# EAGLE board ATW-Farmcard (EAGLE 5.12)
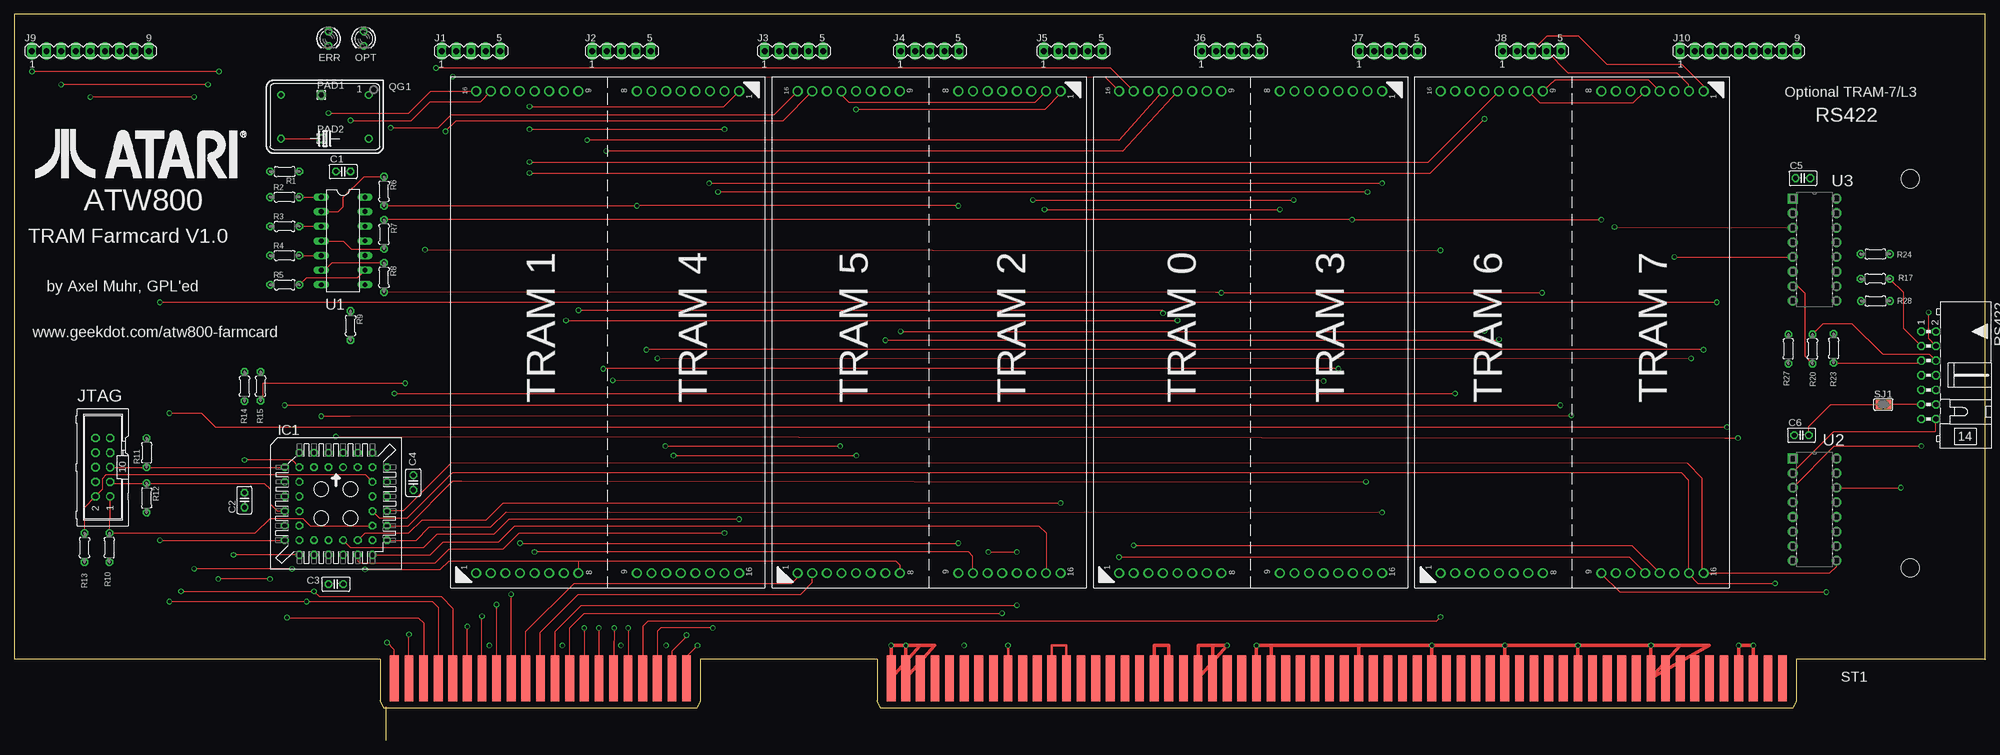
[diagram p0: board, top side]
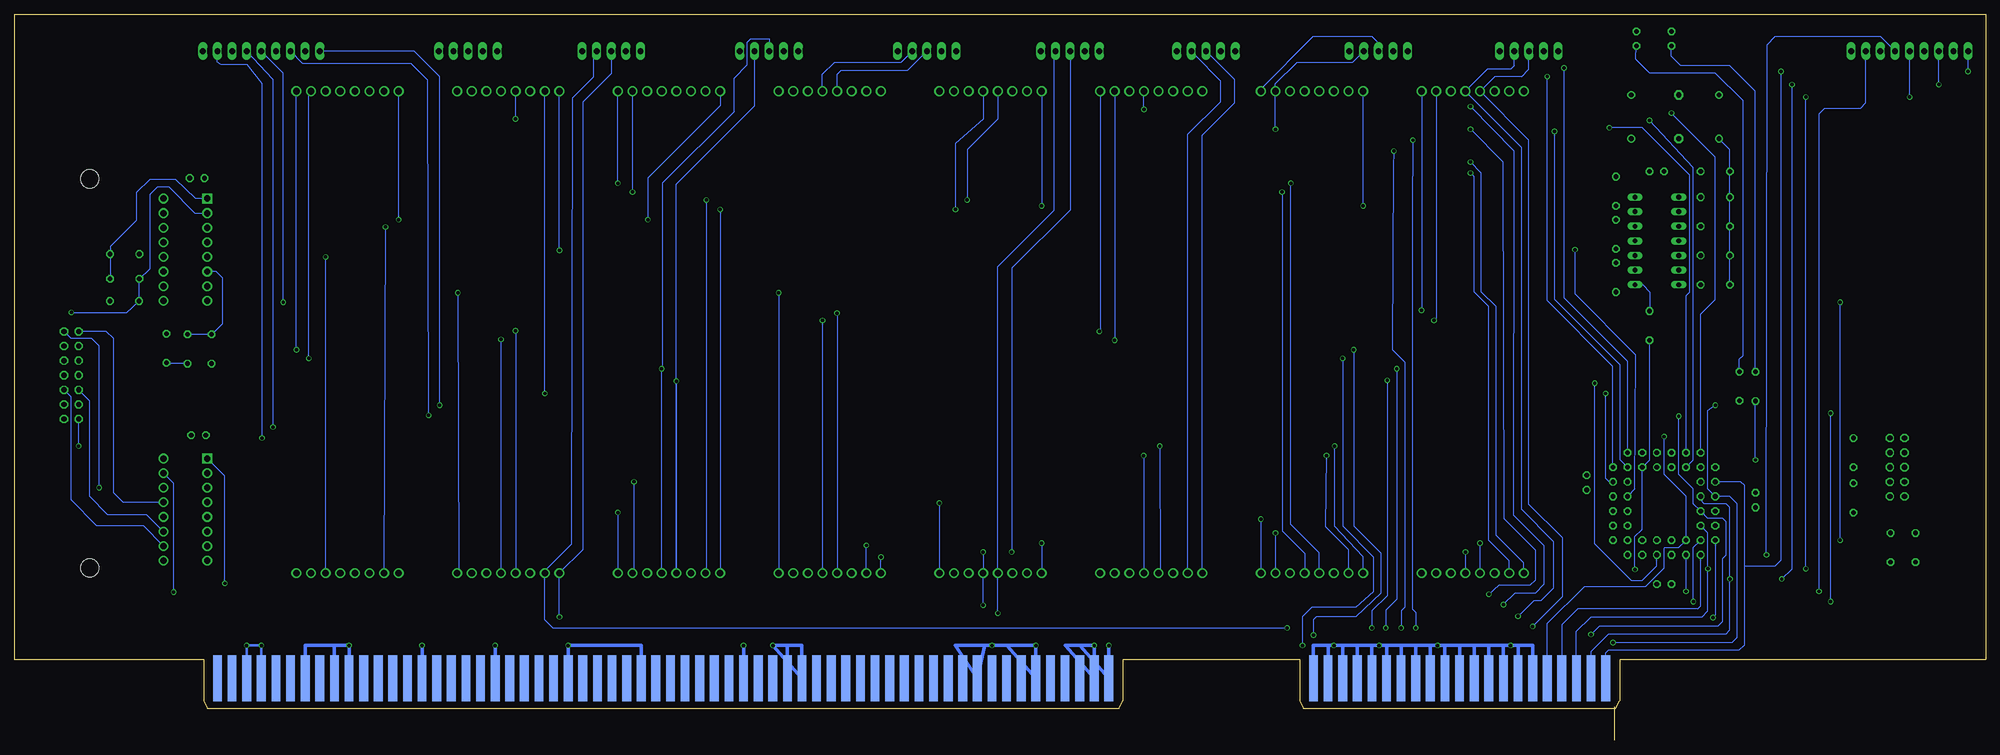
[diagram p1: board, bottom side, seen from below]

Size 342.65 x 126.27 mm. Coordinates in mm from the lower left corner, seen from the top.
Outline: 342.54,13.97 342.54,126.27 0,126.27 0,14.1 61.6,14.1
Copper layers (1+2*15+16): Top 0.035mm / dielectric 1.5mm / $GND 0.035mm / dielectric 0.15mm / $VCC 0.035mm / dielectric 0.2mm / Bottom 0.035mm
Design rules "ShenZhen2U EagleRules *": minimum track width 6mil, minimum drill 12mil, track to track 6mil, track to pad 6mil, pad to pad 7mil, via to via 7mil, smd to smd 0mil, copper to edge 20mil, drill to drill 10mil, minimum pad ring 10mil, minimum via ring 6mil, stop-mask expansion 2mil, vias tented up to drill 25mil, thermal gap 10mil
Holes 3.2 mm at 329.56,97.66 329.56,29.97

## Footprints (pad centres in the part's own frame; a part is rotated, then mirrored left to right if it is on the bottom)
C025-025X050 = drill 0.813 octagon: 1 -1.27,0; 2 1.27,0
LED3MM = drill 0.813 octagon: A -1.27,0; K 1.27,0
PLCC-S44 = drill 0.813 round: 1 1.27,6.35 | drill 0.813 octagon: 2 -1.27,8.89; 3 -1.27,6.35; 4 -3.81,8.89; 5 -3.81,6.35; 6 -6.35,8.89; 7 -8.89,6.35; 8 -6.35,6.35; 9 -8.89,3.81; 10 -6.35,3.81; 11 -8.89,1.27; 12 -6.35,1.27; 13 -8.89,-1.27; 14 -6.35,-1.27; 15 -8.89,-3.81; 16 -6.35,-3.81; 17 -8.89,-6.35; 18 -6.35,-8.89; 19 -6.35,-6.35; 20 -3.81,-8.89; 21 -3.81,-6.35; 22 -1.27,-8.89; 23 -1.27,-6.35; 24 1.27,-8.89; 25 1.27,-6.35; 26 3.81,-8.89; 27 3.81,-6.35; 28 6.35,-8.89; 29 8.89,-6.35; 30 6.35,-6.35; 31 8.89,-3.81; 32 6.35,-3.81; 33 8.89,-1.27; 34 6.35,-1.27; 35 8.89,1.27; 36 6.35,1.27; 37 8.89,3.81; 38 6.35,3.81; 39 8.89,6.35; 40 6.35,8.89; 41 6.35,6.35; 42 3.81,8.89; 43 3.81,6.35; 44 1.27,8.89
MA05-1 = drill 1.016 long: 1 -5.08,0; 2 -2.54,0; 3 0,0; 4 2.54,0; 5 5.08,0
MA09-1 = drill 1.016 long: 1 -10.16,0; 2 -7.62,0; 3 -5.08,0; 4 -2.54,0; 5 0,0; 6 2.54,0; 7 5.08,0; 8 7.62,0; 9 10.16,0
ML10 = drill 0.914 octagon: 1 -5.08,-1.27; 2 -5.08,1.27; 3 -2.54,-1.27; 4 -2.54,1.27; 5 0,-1.27; 6 0,1.27; 7 2.54,-1.27; 8 2.54,1.27; 9 5.08,-1.27; 10 5.08,1.27
1,6/0,9 = drill 0.914 pad 1.6 octagon: 1 0,0
DIL14S = drill 0.813 round: 1 -7.62,-3.81; 7 7.62,-3.81; 8 7.62,3.81; 14 -7.62,3.81
0204/5 = drill 0.813 octagon: 1 -2.54,0; 2 2.54,0
ML14L = drill 0.914 octagon: 1 -7.62,-1.27; 2 -7.62,1.27; 3 -5.08,-1.27; 4 -5.08,1.27; 5 -2.54,-1.27; 6 -2.54,1.27; 7 0,-1.27; 8 0,1.27; 9 2.54,-1.27; 10 2.54,1.27; 11 5.08,-1.27; 12 5.08,1.27; 13 7.62,-1.27; 14 7.62,1.27
SJ = smd 1.168 x 1.6: 1 -0.762,0; 2 0.762,0
ATW_FARMCARD = smd 1.524 x 8.001: A1 -30.48,4.445; A2 -33.02,4.445; A3 -35.56,4.445; A4 -38.1,4.445; A5 -40.64,4.445; A6 -43.18,4.445; A7 -45.72,4.445; A8 -48.26,4.445; A9 -50.8,4.445; A10 -53.34,4.445; A11 -55.88,4.445; A12 -58.42,4.445; A13 -60.96,4.445; A14 -63.5,4.445; A15 -66.04,4.445; A16 -68.58,4.445; A17 -71.12,4.445; A18 -73.66,4.445; A19 -76.2,4.445; A20 -78.74,4.445; A21 -81.28,4.445; A22 -83.82,4.445; A23 -86.36,4.445; A24 -88.9,4.445; A25 -91.44,4.445; A26 -93.98,4.445; A27 -96.52,4.445; A28 -99.06,4.445; A29 -101.6,4.445; A30 -104.14,4.445; A31 -106.68,4.445; A32 -109.22,4.445; A33 -111.76,4.445; A34 -114.3,4.445; A35 -116.84,4.445; A36 -119.38,4.445; A37 -121.92,4.445; A38 -124.46,4.445; A39 -127,4.445; A40 -129.54,4.445; A41 -132.08,4.445; A42 -134.62,4.445; A43 -137.16,4.445; A44 -139.7,4.445; A45 -142.24,4.445; A46 -144.78,4.445; A47 -147.32,4.445; A48 -149.86,4.445; A49 -152.4,4.445; A50 -154.94,4.445; A51 -157.48,4.445; A52 -160.02,4.445; A53 -162.56,4.445; A54 -165.1,4.445; A55 -167.64,4.445; A56 -170.18,4.445; A57 -172.72,4.445; A58 -175.26,4.445; A59 -177.8,4.445; A60 -180.34,4.445; A61 -182.88,4.445; A62 -185.42,4.445; C01 -220.98,4.445; C02 -223.52,4.445; C03 -226.06,4.445; C04 -228.6,4.445; C05 -231.14,4.445; C06 -233.68,4.445; C07 -236.22,4.445; C08 -238.76,4.445; C09 -241.3,4.445; C10 -243.84,4.445; C11 -246.38,4.445; C12 -248.92,4.445; C13 -251.46,4.445; C14 -254,4.445; C15 -256.54,4.445; C16 -259.08,4.445; C17 -261.62,4.445; C18 -264.16,4.445; C19 -266.7,4.445; C20 -269.24,4.445; C21 -271.78,4.445 | smd 1.524 x 8.001 bottom: B1 -30.48,4.445; B2 -33.02,4.445; B3 -35.56,4.445; B4 -38.1,4.445; B5 -40.64,4.445; B6 -43.18,4.445; B7 -45.72,4.445; B8 -48.26,4.445; B9 -50.8,4.445; B10 -53.34,4.445; B11 -55.88,4.445; B12 -58.42,4.445; B13 -60.96,4.445; B14 -63.5,4.445; B15 -66.04,4.445; B16 -68.58,4.445; B17 -71.12,4.445; B18 -73.66,4.445; B19 -76.2,4.445; B20 -78.74,4.445; B21 -81.28,4.445; B22 -83.82,4.445; B23 -86.36,4.445; B24 -88.9,4.445; B25 -91.44,4.445; B26 -93.98,4.445; B27 -96.52,4.445; B28 -99.06,4.445; B29 -101.6,4.445; B30 -104.14,4.445; B31 -106.68,4.445; B32 -109.22,4.445; B33 -111.76,4.445; B34 -114.3,4.445; B35 -116.84,4.445; B36 -119.38,4.445; B37 -121.92,4.445; B38 -124.46,4.445; B39 -127,4.445; B40 -129.54,4.445; B41 -132.08,4.445; B42 -134.62,4.445; B43 -137.16,4.445; B44 -139.7,4.445; B45 -142.24,4.445; B46 -144.78,4.445; B47 -147.32,4.445; B48 -149.86,4.445; B49 -152.4,4.445; B50 -154.94,4.445; B51 -157.48,4.445; B52 -160.02,4.445; B53 -162.56,4.445; B54 -165.1,4.445; B55 -167.64,4.445; B56 -170.18,4.445; B57 -172.72,4.445; B58 -175.26,4.445; B59 -177.8,4.445; B60 -180.34,4.445; B61 -182.88,4.445; B62 -185.42,4.445; D01 -220.98,4.445; D02 -223.52,4.445; D03 -226.06,4.445; D04 -228.6,4.445; D05 -231.14,4.445; D06 -233.68,4.445; D07 -236.22,4.445; D08 -238.76,4.445; D09 -241.3,4.445; D10 -243.84,4.445; D11 -246.38,4.445; D12 -248.92,4.445; D13 -251.46,4.445; D14 -254,4.445; D15 -256.54,4.445; D16 -259.08,4.445; D17 -261.62,4.445; D18 -264.16,4.445; D19 -266.7,4.445; D20 -269.24,4.445; D21 -271.78,4.445
TRAM_SIZE2_SOCKET = drill 1.143 pad 1.676 round: A1 0.635,-1.524; A2 0.635,-4.064; A3 0.635,-6.604; A4 0.635,-9.144; A5 0.635,-11.684; A6 0.635,-14.224; A7 0.635,-16.764; A8 0.635,-19.304; A9 84.455,-19.304; A10 84.455,-16.764; A11 84.455,-14.224; A12 84.455,-11.684; A13 84.455,-9.144; A14 84.455,-6.604; A15 84.455,-4.064; A16 84.455,-1.524; B1 84.455,-47.244; B2 84.455,-44.704; B3 84.455,-42.164; B4 84.455,-39.624; B5 84.455,-37.084; B6 84.455,-34.544; B7 84.455,-32.004; B8 84.455,-29.464; B9 0.635,-29.464; B10 0.635,-32.004; B11 0.635,-34.544; B12 0.635,-37.084; B13 0.635,-39.624; B14 0.635,-42.164; B15 0.635,-44.704; B16 0.635,-47.244
DIL14 = drill 0.813 long: 1 -7.62,-3.81; 2 -5.08,-3.81; 3 -2.54,-3.81; 4 0,-3.81; 5 2.54,-3.81; 6 5.08,-3.81; 7 7.62,-3.81; 8 7.62,3.81; 9 5.08,3.81; 10 2.54,3.81; 11 0,3.81; 12 -2.54,3.81; 13 -5.08,3.81; 14 -7.62,3.81
DIP254P762X508-16 = drill 1.118 square: 1 -7.62,17.78 | drill 1.118 round: 2 -7.62,15.24; 3 -7.62,12.7; 4 -7.62,10.16; 5 -7.62,7.62; 6 -7.62,5.08; 7 -7.62,2.54; 8 -7.62,0; 9 0,0; 10 0,2.54; 11 0,5.08; 12 0,7.62; 13 0,10.16; 14 0,12.7; 15 0,15.24; 16 0,17.78

## Placement (x,y rotation side)
C1  100nf  [C025-025X050]  57.15,98.93 0 top
C2  100nf  [C025-025X050]  40.01,41.78 90 top
C3  100nf  [C025-025X050]  55.88,27.18 0 top
C4  100nf  [C025-025X050]  69.34,44.83 90 top
C5  100nF  [C025-025X050]  310.9,97.79 0 top
C6  100nF  [C025-025X050]  310.64,53.09 0 top
ERR  [LED3MM]  54.61,122.05 270 top
IC1  EPM7064S44  [PLCC-S44]  55.88,41.15 0 top
J1  [MA05-1]  79.38,119.89 0 top
J2  [MA05-1]  105.54,119.89 0 top
J3  [MA05-1]  135.51,119.89 0 top
J4  [MA05-1]  159.13,119.89 0 top
J5  [MA05-1]  184.02,119.89 0 top
J6  [MA05-1]  211.46,119.89 0 top
J7  [MA05-1]  238.89,119.89 0 top
J8  [MA05-1]  263.78,119.89 0 top
J9  [MA09-1]  13.21,119.89 0 top
J10  [MA09-1]  299.72,119.89 0 top
JTAG  [ML10]  15.37,47.5 90 top
OPT  [LED3MM]  60.71,122.05 270 top
PAD1  [1,6/0,9]  53.34,112.27 0 top
PAD2  [1,6/0,9]  53.34,104.65 0 top
QG1  5MHz  [DIL14S]  53.98,108.46 180 top
R1  4k7  [0204/5]  46.99,98.93 180 top
R2  100  [0204/5]  46.99,94.49 0 top
R3  100  [0204/5]  46.99,89.41 0 top
R4  100  [0204/5]  46.99,84.33 0 top
R5  100  [0204/5]  46.99,79.25 0 top
R6  100  [0204/5]  64.26,95.5 270 top
R7  100  [0204/5]  64.26,88.01 90 top
R8  100  [0204/5]  64.26,80.52 270 top
R9  100  [0204/5]  58.42,72.14 270 top
R10  10K  [0204/5]  16.51,33.53 90 top
R11  10K  [0204/5]  22.99,50.04 90 top
R12  10K  [0204/5]  22.99,42.16 270 top
R13  10K  [0204/5]  12.19,33.53 270 top
R14  330  [0204/5]  40.01,61.55 90 top
R15  330  [0204/5]  42.8,61.59 90 top
R17  120  [0204/5]  323.47,80.26 0 top
R20  120  [0204/5]  312.55,68.07 90 top
R23  1k  [0204/5]  316.23,68.2 90 top
R24  1k  [0204/5]  323.47,84.58 180 top
R27  1k  [0204/5]  308.36,68.07 90 top
R28  1k  [0204/5]  323.51,76.41 180 top
RS422  [ML14L]  332.74,63.5 270 top
SJ1  [SJ]  324.87,58.42 0 top
ST1  [ATW_FARMCARD]  337.82,6.35 0 top
TRAM2DEV_1  slot_6_7  [TRAM_SIZE2_SOCKET]  246.38,28.45 90 top
TRAM2DEV_2  slot_0_3  [TRAM_SIZE2_SOCKET]  190.5,28.45 90 top
TRAM2DEV_3  slot_5_2  [TRAM_SIZE2_SOCKET]  134.62,28.45 90 top
TRAM2DEV_4  SLOT_1_4  [TRAM_SIZE2_SOCKET]  78.74,28.45 90 top
U1  7414N  [DIL14]  57.15,86.87 270 top
U2  LS31  [DIP254P762X508-16]  316.74,31.24 0 top
U3  LS32  [DIP254P762X508-16]  316.74,76.45 0 top

## Library data of the parts
C1-C6 R1-R15 R17 R20 R23 R24 R27 R28 = rcl
ERR OPT = led
IC1 = altera; MPN: EPM7064SLC44-10N; OC_FARNELL: 1549449; OC_NEWARK: 51R0526
J1-J10 = con-lstb; OC_FARNELL: unknown; OC_NEWARK: unknown
JTAG RS422 = con-ml; OC_FARNELL: unknown; OC_NEWARK: unknown
PAD1 PAD2 = wirepad
QG1 = crystal; OC_FARNELL: unknown; OC_NEWARK: unknown
SJ1 = jumper
ST1 TRAM2DEV_1-TRAM2DEV_4 = axels
U1 = 74ttl-din
U2 = axels; MPN: DS26LS31CN; OC_FARNELL: 9487867; OC_NEWARK: 41K1835; PACKAGE: 16-DIP; SUPPLIER: National Semiconductor
U3 = axels; MPN: AM26C32IN; OC_FARNELL: 1295964; OC_NEWARK: 74C7309; PACKAGE: PDIP-16; SUPPLIER: Texas Instruments

## Nets
0_0IN: J5.4 ST1.C07 TRAM2DEV_2.A12
0_0OUT: J5.3 ST1.C08 TRAM2DEV_2.A13
0_1IN_3_OUT: TRAM2DEV_2.A5 TRAM2DEV_4.A10
0_1OUT_1_3IN: TRAM2DEV_2.A4 TRAM2DEV_4.A9
0_3IN: TRAM2DEV_2.A9
0_3OUT: TRAM2DEV_2.A10
0_ANA: IC1.39 TRAM2DEV_2.A16
0_ERR: TRAM2DEV_2.A14
0_RES: IC1.40 TRAM2DEV_2.A15
1_0IN: J1.4 ST1.C15 TRAM2DEV_4.A12
1_0OUT: J1.3 ST1.C16 TRAM2DEV_4.A13
1_1IN_2_3OUT: TRAM2DEV_3.B10 TRAM2DEV_4.A5
1_1OUT_2_3IN: TRAM2DEV_3.B9 TRAM2DEV_4.A4
1_2IN_6_0OUT: TRAM2DEV_1.A13 TRAM2DEV_4.A2
1_2OUT_6_0IN: TRAM2DEV_1.A12 TRAM2DEV_4.A1
1_ANA: IC1.6 TRAM2DEV_4.A16
1_ERR: TRAM2DEV_4.A14
1_RES: IC1.5 TRAM2DEV_4.A15
2_0IN: J4.4 ST1.C09 TRAM2DEV_3.B12
2_0OUT: J4.3 ST1.C10 TRAM2DEV_3.B13
2_1IN_3_3OUT: TRAM2DEV_2.B10 TRAM2DEV_3.B5
2_1OUT_3_3IN: TRAM2DEV_2.B9 TRAM2DEV_3.B4
2_ANA: IC1.27 TRAM2DEV_3.B16
2_ERR: TRAM2DEV_3.B14
2_RES: IC1.28 TRAM2DEV_3.B15
3_0IN: J6.4 ST1.C05 TRAM2DEV_2.B12
3_0OUT: J6.3 ST1.C06 TRAM2DEV_2.B13
3_1IN: TRAM2DEV_2.B5
3_1OUT: TRAM2DEV_2.B4
3_2IN_4_0OUT: TRAM2DEV_2.B2 TRAM2DEV_4.B13
3_2OUT_4_0IN: TRAM2DEV_2.B1 TRAM2DEV_4.B12
3_ANA: IC1.29 TRAM2DEV_2.B16
3_ERR: TRAM2DEV_2.B14
3_RES: IC1.31 TRAM2DEV_2.B15
4_1IN: TRAM2DEV_4.B4
4_1OUT: TRAM2DEV_4.B5
4_2IN: J2.4 ST1.C13 TRAM2DEV_4.B2
4_2OUT: J2.3 ST1.C14 TRAM2DEV_4.B1
4_3IN_5_1OUT: TRAM2DEV_3.A4 TRAM2DEV_4.B9
4_3OUT_5_1IN: TRAM2DEV_3.A5 TRAM2DEV_4.B10
4_ANA: IC1.25 TRAM2DEV_4.B16
4_ERR: TRAM2DEV_4.B14
4_RES: IC1.26 TRAM2DEV_4.B15
5_0IN_2_2OUT: TRAM2DEV_3.A12 TRAM2DEV_3.B1
5_0OUT_2_2IN: TRAM2DEV_3.A13 TRAM2DEV_3.B2
5_2IN: J3.4 ST1.C11 TRAM2DEV_3.A2
5_2OUT: J3.3 ST1.C12 TRAM2DEV_3.A1
5_3IN_6_1OUT: TRAM2DEV_1.A4 TRAM2DEV_3.A9
5_3OUT_6_1IN: TRAM2DEV_1.A5 TRAM2DEV_3.A10
5_ANA: IC1.4 TRAM2DEV_3.A16
5_ERR: TRAM2DEV_3.A14
5_RES: IC1.41 TRAM2DEV_3.A15
6_2IN: J7.4 ST1.C03 TRAM2DEV_1.A2
6_2OUT: J7.3 ST1.C04 TRAM2DEV_1.A1
6_3IN_7_1OUT: TRAM2DEV_1.A9 TRAM2DEV_1.B4
6_3OUT_7_1IN: TRAM2DEV_1.A10 TRAM2DEV_1.B5
6_ANA: IC1.36 TRAM2DEV_1.A16
6_ERR: TRAM2DEV_1.A14
6_RES: IC1.37 TRAM2DEV_1.A15
7_0IN_0_2OUT: TRAM2DEV_1.B12 TRAM2DEV_2.A1
7_0OUT_0_2IN: TRAM2DEV_1.B13 TRAM2DEV_2.A2
7_2IN: J8.4 ST1.C01 TRAM2DEV_1.B2
7_2OUT: J8.3 ST1.C02 TRAM2DEV_1.B1
7_3IN: TRAM2DEV_1.B9 U2.15
7_3OUT: TRAM2DEV_1.B10 U3.3
7_ANA: IC1.33 TRAM2DEV_1.B16 U2.9
7_ERR: TRAM2DEV_1.B14 U3.5
7_RES: IC1.34 TRAM2DEV_1.B15 U2.1
+UB: U1.14
-UB: U1.7
ANA1_MINUS: RS422.9 U2.11
ANA1_PLUS: RS422.10 U2.10
CLK_1: R6.2 TRAM2DEV_3.B8 TRAM2DEV_4.B8
CLK_2: R7.2 TRAM2DEV_1.B8 TRAM2DEV_2.B8
CLK_3: R8.2 TRAM2DEV_1.A8 TRAM2DEV_2.A8
CLK_4: IC1.43 R9.2 TRAM2DEV_3.A8 TRAM2DEV_4.A8
ERROR1_MINUS: R20.1 R23.1 RS422.5 U3.7
ERROR1_PLUS: R20.2 R27.2 RS422.6 U3.6
FAST_IN: IC1.12 J9.3 ST1.D20
FAST_OUT: IC1.14 J10.3 ST1.C20
GLOBAL_RESET_IN: IC1.18 J9.6 ST1.D18
GLOBAL_RESET_OUT: IC1.19 J10.6 ST1.C18
GND: C1.2 C2.2 C3.2 C4.2 C5.2 C6.2 IC1.2 IC1.10 IC1.22 IC1.30 IC1.42 IC1.44 J1.1 J1.5 J2.1 J2.5 J3.1 J3.5 J4.1 J4.5 J5.1 J5.5 J6.1 J6.5 J7.1 J7.5 J8.1 J8.5 J9.9 J10.9 JTAG.6 JTAG.10 PAD1.1 QG1.7 R10.1 R27.1 R28.1 RS422.7 RS422.8 SJ1.1 ST1.A6 ST1.A8 ST1.A10 ST1.A15 ST1.A20 ST1.A25 ST1.A30 ST1.A36 ST1.A37 ST1.A54 ST1.B7 ST1.B9 ST1.B10 ST1.B15 ST1.B20 ST1.B25 ST1.B30 ST1.B37 ST1.B51 ST1.B53 ST1.B55 ST1.B57 ST1.D01 ST1.D02 ST1.D03 ST1.D04 ST1.D05 ST1.D06 ST1.D07 ST1.D08 ST1.D09 ST1.D10 ST1.D11 ST1.D12 ST1.D13 ST1.D14 ST1.D15 ST1.D16 TRAM2DEV_1.A11 TRAM2DEV_1.B11 TRAM2DEV_2.A11 TRAM2DEV_2.B11 TRAM2DEV_3.A11 TRAM2DEV_3.B11 TRAM2DEV_4.A11 TRAM2DEV_4.B11 U2.7 U2.8 U2.12 U3.8 U3.12
L_IN: IC1.9 J9.1 ST1.D21
L_OUT: IC1.11 J10.1 ST1.C21
LINKIN1_MINUS: R17.2 R24.1 RS422.3 U3.1
LINKIN1_PLUS: R17.1 R28.2 RS422.4 U3.2
LINKOUT1_MINUS: RS422.1 U2.13
LINKOUT1_PLUS: RS422.2 U2.14
N$1: PAD2.1 QG1.8 R1.2 R2.1 R3.1 R4.1 R5.1
N$2: R2.2 U1.1
N$3: R3.2 U1.3
N$4: R4.2 U1.5
N$5: R5.2 U1.9
N$6: R9.1 U1.8
N$7: R8.1 U1.6
N$8: R7.1 U1.4
N$9: R6.1 U1.2
N$10: ERR.K R14.2
N$11: IC1.8 R14.1
N$12: ST1.A50 ST1.A51
N$13: IC1.24 R15.1
N$14: J10.2
N$15: ST1.A43 ST1.A44
N$16: OPT.K R15.2
N$18: RS422.11 RS422.12 SJ1.2
N$20: IC1.32 JTAG.1 R10.2
N$24: IC1.38 JTAG.2 R13.1
N$25: IC1.13 JTAG.3 R12.1
N$26: IC1.7 JTAG.5 R11.1
N$28: J9.2
RESET1_MINUS: RS422.13 U2.3
RESET1_PLUS: RS422.14 U2.2
SLOW_IN: IC1.16 J9.5 ST1.D19
SLOW_OUT: IC1.17 J10.5 ST1.C19
T_ERR_I: IC1.20 J9.8 ST1.C17
T_ERR_O: IC1.21 J10.8 ST1.D17
VCC: C1.1 C2.1 C3.1 C4.1 C5.1 C6.1 ERR.A IC1.1 IC1.15 IC1.23 IC1.35 JTAG.7 OPT.A QG1.14 R1.1 R11.2 R12.2 R13.2 R23.2 R24.2 ST1.A3 ST1.A4 ST1.A39 ST1.A40 ST1.A41 ST1.A59 ST1.A60 ST1.A61 ST1.A62 ST1.B3 ST1.B4 ST1.B39 ST1.B40 ST1.B41 ST1.B59 ST1.B60 ST1.B61 ST1.B62 TRAM2DEV_1.A3 TRAM2DEV_1.A6 TRAM2DEV_1.A7 TRAM2DEV_1.B3 TRAM2DEV_1.B6 TRAM2DEV_1.B7 TRAM2DEV_2.A3 TRAM2DEV_2.A6 TRAM2DEV_2.A7 TRAM2DEV_2.B3 TRAM2DEV_2.B6 TRAM2DEV_2.B7 TRAM2DEV_3.A3 TRAM2DEV_3.A6 TRAM2DEV_3.A7 TRAM2DEV_3.B3 TRAM2DEV_3.B6 TRAM2DEV_3.B7 TRAM2DEV_4.A3 TRAM2DEV_4.A6 TRAM2DEV_4.A7 TRAM2DEV_4.B3 TRAM2DEV_4.B6 TRAM2DEV_4.B7 U2.4 U2.16 U3.4 U3.16

## Tracks (layer width: path | path; a pad name or v marks a point on that pad's centre or on a via)
0_0IN  (via drill 0.6)
  Top 0.152: v101.6,19.56 ST1.C07 | v102.87,102.49 192.66,102.49 TRAM2DEV_2.A12
  Bottom 0.152: TRAM2DEV_2.A12 202.18,115.82 200.03,117.98 188.47,117.98 J5.4 | v101.6,19.56 101.6,22.48 100.96,23.11 100.96,65.79 103.12,67.94 103,99.69 v102.87,102.49
0_0OUT  (via drill 0.6)
  Top 0.152: v99.06,19.56 ST1.C08 | v99.57,104.39 192.02,104.39 TRAM2DEV_2.A13
  Bottom 0.152: TRAM2DEV_2.A13 199.64,115.82 198.88,116.59 187.33,116.59 J5.3 | v99.06,19.56 99.06,22.23 99.69,22.86 99.69,91.82 v99.57,104.39
0_1IN_3_OUT  (via drill 0.6)
  Top 0.152: v95.88,73.03 v202.18,73.03
  Bottom 0.152: TRAM2DEV_4.A10 95.5,73.41 v95.88,73.03 | v202.18,73.03 TRAM2DEV_2.A5
0_1OUT_1_3IN  (via drill 0.6)
  Top 0.152: v98.04,74.8 199.52,74.8 v199.64,74.3
  Bottom 0.152: TRAM2DEV_4.A9 v98.04,74.8 | v199.64,74.3 TRAM2DEV_2.A4
0_ANA  (via drill 0.6)
  Top 0.152: v76.2,115.44 83.57,115.44 189.61,115.32 TRAM2DEV_2.A16
  Bottom 0.152: IC1.39 64.77,65.02 76.2,76.45 v76.2,115.44
0_RES  (via drill 0.6)
  Top 0.152: v73.28,116.97 190.5,116.97 TRAM2DEV_2.A15
  Bottom 0.152: IC1.40 62.23,65.91 73.28,76.96 v73.28,116.97
1_0IN  (via drill 0.6)
  Top 0.152: ST1.C15 v81.28,21.59
  Bottom 0.152: J1.4 81.91,117.35 82.55,116.71 86.61,116.71 TRAM2DEV_4.A12 80.64,103.12 80.64,40.13 75.06,34.54 75.06,26.54 77.22,24.38 78.49,24.38 v81.28,21.59
1_0OUT  (via drill 0.6)
  Top 0.152: ST1.C16 v78.74,19.81
  Bottom 0.152: J1.3 79.38,116.71 80.64,115.44 85.34,115.44 TRAM2DEV_4.A13 79.38,104.39 79.38,41.02 73.53,35.18 73.53,25.02 v78.74,19.81
1_1IN_2_3OUT  (via drill 0.6)
  Top 0.152: TRAM2DEV_3.B10 166.62,32 165.86,32.77 v90.42,32.77
  Bottom 0.152: v90.42,32.77 TRAM2DEV_4.A5
1_1OUT_2_3IN  (via drill 0.6)
  Top 0.152: v87.88,34.29 v164.08,34.29
  Bottom 0.152: TRAM2DEV_4.A4 v87.88,34.29 | v164.08,34.29 TRAM2DEV_3.B9
1_2IN_6_0OUT  (via drill 0.6)
  Top 0.152: v89.53,98.68 246.13,98.68 v255.52,108.08
  Bottom 0.152: TRAM2DEV_4.A2 82.8,31.24 86.36,34.8 86.36,75.44 88.9,77.98 88.9,98.04 v89.53,98.68 | v255.52,108.08 TRAM2DEV_1.A13
1_2OUT_6_0IN  (via drill 0.6)
  Top 0.152: v89.53,100.58 245.75,100.58 TRAM2DEV_1.A12
  Bottom 0.152: TRAM2DEV_4.A1 80.26,30.86 85.09,35.69 85.09,75.44 87.63,77.98 87.63,98.68 v89.53,100.58
1_ANA  (via drill 0.6)
  Top 0.152: v54.61,109.09 68.58,109.09 72.39,112.9 TRAM2DEV_4.A16
  Bottom 0.152: IC1.6 49.53,74.17 46.99,76.71 46.99,101.47 v54.61,109.09
1_RES  (via drill 0.6)
  Top 0.152: v58.42,107.82 68.96,107.82 72.26,111.12 81.03,111.12 TRAM2DEV_4.A15
  Bottom 0.152: IC1.5 50.8,48.77 50.8,99.57 v58.42,107.82
2_0IN  (via drill 0.6)
  Top 0.152: ST1.C09 96.52,19.56 99.06,22.1 v171.7,22.1
  Bottom 0.152: v171.7,22.1 TRAM2DEV_3.B12 171.7,82.42 161.93,92.2 161.93,119.63 J4.4
2_0OUT  (via drill 0.6)
  Top 0.152: ST1.C10 93.98,18.92 98.55,23.49 v174.24,23.49 | v169.29,32.77 v174.24,32.77
  Bottom 0.152: v174.24,23.49 TRAM2DEV_3.B13 v174.24,32.77 | 159.13,120.27 J4.3 159.13,92.2 169.29,82.17 v169.29,32.77
2_1IN_3_3OUT  (via drill 0.6)
  Top 0.152: v177.04,93.98 v222.38,93.98
  Bottom 0.152: TRAM2DEV_3.B5 171.7,108.08 177.04,102.74 v177.04,93.98 | v222.38,93.98 222.38,29.21 TRAM2DEV_2.B10
2_1OUT_3_3IN  (via drill 0.6)
  Top 0.152: v179.07,92.33 v219.96,92.33
  Bottom 0.152: TRAM2DEV_3.B4 174.24,108.08 179.07,103.76 v179.07,92.33 | v219.96,92.33 TRAM2DEV_2.B9
2_ANA  (via drill 0.6)
  Top 0.152: IC1.27 60.96,36.07 68.58,36.07 70.87,38.35 82.04,38.35 84.96,41.27 v181.86,41.27
  Bottom 0.152: v181.86,41.27 TRAM2DEV_3.B16
2_RES
  Top 0.152: IC1.28 72.26,32.26 74.55,34.54 84.2,34.54 86.99,37.34 178.05,37.34 179.32,36.07 TRAM2DEV_3.B15
3_0IN  (via drill 0.6)
  Top 0.152: v106.68,19.56 ST1.C05 | v227.58,62.48 v104.01,62.61
  Bottom 0.152: v104.01,62.61 104.01,25.15 106.68,22.48 v106.68,19.56 | v227.58,62.48 TRAM2DEV_2.B12 227.58,96.77 214,110.36 J6.4
3_0OUT  (via drill 0.6)
  Top 0.152: v104.27,19.56 ST1.C06 | v230.12,64.64 v102.36,64.64
  Bottom 0.152: v104.27,19.56 104.27,22.61 102.36,24.51 v102.36,64.64 | J6.3 211.46,122.05 214.63,122.05 215.27,121.41 215.27,117.47 217.55,115.19 217.55,109.35 230,96.9 230,64.77 v230.12,64.64 TRAM2DEV_2.B13
3_2IN_4_0OUT  (via drill 0.6)
  Top 0.152: v235.2,95.38 v122.3,95.38
  Bottom 0.152: TRAM2DEV_2.B2 v235.2,95.38 | v122.3,95.38 122.3,36.45 118.36,32.51 TRAM2DEV_4.B13
3_2OUT_4_0IN  (via drill 0.6)
  Top 0.152: v120.78,96.9 v237.74,96.9
  Bottom 0.152: TRAM2DEV_4.B12 115.82,32.64 120.78,37.59 v120.78,96.9 | v237.74,96.9 TRAM2DEV_2.B1
3_ANA  (via drill 0.6)
  Top 0.152: IC1.29 69.85,34.8 72.14,37.08 82.8,37.08 85.47,39.75 v237.74,39.62
  Bottom 0.152: v237.74,39.62 TRAM2DEV_2.B16
3_RES  (via drill 0.6)
  Top 0.152: IC1.31 68.45,37.34 76.2,45.08 77.72,45.08 v234.95,44.96
  Bottom 0.152: v234.95,44.96 234.95,29.34 TRAM2DEV_2.B15
4_2IN  (via drill 0.6)
  Top 0.152: ST1.C13 v86.36,25.4 | v89.53,106.3 v123.44,106.3
  Bottom 0.152: J2.4 109.98,117.98 119.63,117.98 123.44,114.17 TRAM2DEV_4.B2 v123.44,106.3 | v86.36,25.4 84.58,27.05 79.12,27.05 78.23,27.94 78.23,33.02 83.69,38.48 83.82,100.58 v89.53,106.3
4_2OUT  (via drill 0.6)
  Top 0.152: ST1.C14 v83.82,23.62 | v89.53,110.24 123.32,110.24 TRAM2DEV_4.B1
  Bottom 0.152: TRAM2DEV_4.B1 125.98,113.28 116.84,122.43 106.68,122.43 105.41,121.16 105.41,120.02 J2.3 105.41,119.76 | v83.82,23.62 81.79,25.65 78.23,25.65 76.71,27.18 76.71,33.78 82.04,39.12 81.91,102.49 v89.53,110.24
4_3IN_5_1OUT  (via drill 0.6)
  Top 0.152: v113.16,51.18 v143.55,51.18
  Bottom 0.152: TRAM2DEV_4.B9 108.2,31.88 113.16,37.21 v113.16,51.18 | v143.55,51.18 143.51,29.34 TRAM2DEV_3.A4
4_3OUT_5_1IN  (via drill 0.6)
  Top 0.152: v114.55,49.53 v146.35,49.53
  Bottom 0.152: TRAM2DEV_4.B10 110.74,33.15 114.68,37.08 v114.55,49.53 | v146.35,49.53 TRAM2DEV_3.A5
4_ANA  (via drill 0.6)
  Top 0.152: IC1.25 58.42,33.53 71.12,33.53 73.53,35.94 83.44,35.94 85.98,38.48 v125.98,38.48
  Bottom 0.152: v125.98,38.48 TRAM2DEV_4.B16
4_RES  (via drill 0.6)
  Top 0.152: IC1.26 59.69,31.24 60.07,30.86 73.15,30.86 75.56,33.27 84.96,33.27 87.76,36.07 v123.44,36.07
  Bottom 0.152: v123.44,36.07 TRAM2DEV_4.B15
5_0IN_2_2OUT  (via drill 0.6)
  Top 0.152: TRAM2DEV_3.B1 181.86,112.52 179.07,109.73 v146.3,109.73
  Bottom 0.152: v146.3,109.73 TRAM2DEV_3.A12
5_0OUT_2_2IN
  Top 0.152: TRAM2DEV_3.A13 143.76,112.27 145.03,111 177.42,111 TRAM2DEV_3.B2
5_2IN
  Top 0.152: ST1.C11 91.44,18.8 98.04,25.4 136.65,25.4 138.68,27.43 TRAM2DEV_3.A2
  Bottom 0.152: TRAM2DEV_3.A2 138.68,105.41 132.97,111.12 132.97,114.68 137.41,119.13 J3.4
5_2OUT
  Top 0.152: ST1.C12 88.9,18.92 97.28,27.3 135.13,27.3 136.14,28.32 TRAM2DEV_3.A1
  Bottom 0.152: TRAM2DEV_3.A1 136.14,105.28 130.56,110.87 130.56,114.94 J3.3
5_3IN_6_1OUT  (via drill 0.6)
  Top 0.152: v154.05,71.12 255.4,71.12 v255.52,71.25
  Bottom 0.152: TRAM2DEV_3.A9 153.92,71.25 v154.05,71.12 | v255.52,71.25 TRAM2DEV_1.A4
5_3OUT_6_1IN  (via drill 0.6)
  Top 0.152: v151.38,69.6 257.94,69.6 v258.06,69.72
  Bottom 0.152: TRAM2DEV_3.A10 v151.38,69.6 | v258.06,69.72 TRAM2DEV_1.A5
5_ANA  (via drill 0.6)
  Top 0.152: v65.4,106.55 73.66,106.55 75.95,108.84 132.08,108.84 TRAM2DEV_3.A16
  Bottom 0.152: IC1.4 52.07,77.34 51.44,77.98 51.44,98.3 59.69,106.55 v65.4,106.55
5_RES  (via drill 0.6)
  Top 0.152: v74.93,105.92 76.83,107.82 133.6,107.82 TRAM2DEV_3.A15
  Bottom 0.152: IC1.41 63.5,48.77 63.5,65.28 74.93,76.71 v74.93,105.92
6_2IN  (via drill 0.6)
  Top 0.152: v121.41,19.56 112.39,19.56 111.76,18.92 ST1.C03
  Bottom 0.152: v121.41,19.56 249.05,19.56 250.44,20.95 TRAM2DEV_1.A2 250.44,29.46 245.75,34.16 245.62,111.76 241.94,115.44 241.94,119.38 J7.4
6_2OUT  (via drill 0.6)
  Top 0.152: ST1.C04 109.22,19.68 109.22,19.81 110.11,20.7 247.14,20.7 v247.9,21.46
  Bottom 0.152: v247.9,21.46 TRAM2DEV_1.A1 243.84,33.15 243.84,111 238.89,115.95 J7.3
6_3IN_7_1OUT
  Top 0.152: TRAM2DEV_1.A9 267.84,114.94 283.97,114.94 TRAM2DEV_1.B4
6_3OUT_7_1IN
  Top 0.152: TRAM2DEV_1.A10 265.18,110.87 281.43,110.87 TRAM2DEV_1.B5
6_ANA  (via drill 0.6)
  Top 0.152: v71.37,85.34 v247.9,85.22
  Bottom 0.152: IC1.36 60.96,43.69 60.83,67.06 71.37,77.6 v71.37,85.34 | v247.9,85.22 TRAM2DEV_1.A16
6_RES  (via drill 0.6)
  Top 0.152: v66.04,60.32 v250.44,60.32
  Bottom 0.152: IC1.37 65.4,44.96 66.04,45.59 v66.04,60.32 | v250.44,60.32 TRAM2DEV_1.A15
7_0IN_0_2OUT  (via drill 0.6)
  Top 0.152: v192.02,31.88 280.67,31.88 TRAM2DEV_1.B12
  Bottom 0.152: TRAM2DEV_2.A1 v192.02,31.88
7_0OUT_0_2IN  (via drill 0.6)
  Top 0.152: v194.56,33.91 281.18,33.91 TRAM2DEV_1.B13
  Bottom 0.152: TRAM2DEV_2.A2 v194.56,33.91
7_2IN  (via drill 0.6)
  Top 0.152: ST1.C01 116.84,14.6 v118.74,16.51 | v111.76,66.42 291.46,66.29 v291.46,66.42 | TRAM2DEV_1.B2 291.08,114.05 289.05,116.08 270.13,116.08 J8.4
  Bottom 0.152: v118.74,16.51 118.74,21.46 117.09,23.11 109.47,23.11 106.43,25.78 106.43,31.88 111.76,37.34 v111.76,66.42 | v291.46,66.42 291.46,112.52 TRAM2DEV_1.B2
7_2OUT  (via drill 0.6)
  Top 0.152: ST1.C02 114.3,15.49 116.46,17.65 v116.84,18.29 | v293.62,67.94 v109.85,67.94 | TRAM2DEV_1.B1 293.62,113.79 289.94,117.47 276.86,117.47 271.91,122.43 266.32,122.43 J8.3
  Bottom 0.152: v116.84,18.29 116.84,20.95 116.33,21.46 109.47,21.46 105.16,25.53 105.16,32.64 109.85,37.34 v109.85,67.94 | v293.62,67.94 TRAM2DEV_1.B1
7_3IN  (via drill 0.6)
  Top 0.152: TRAM2DEV_1.B9 275.84,28.96 279.02,25.78 v314.96,25.78
  Bottom 0.152: v314.96,25.78 314.96,44.7 U2.15
7_3OUT  (via drill 0.6)
  Top 0.152: v278.13,89.28 U3.3
  Bottom 0.152: TRAM2DEV_1.B10 v278.13,89.28
7_ANA
  Top 0.152: IC1.33 67.56,39.88 75.95,48.26 290.83,48.13 293.37,45.59 293.37,29.34 TRAM2DEV_1.B16 315.59,29.08 316.74,30.23 U2.9
7_ERR  (via drill 0.6)
  Top 0.152: v288.54,84.07 U3.5
  Bottom 0.152: TRAM2DEV_1.B14 v288.54,84.07
7_RES  (via drill 0.6)
  Top 0.152: IC1.34 63.5,38.61 68.2,38.61 76.07,46.48 289.81,46.48 291.08,45.21 TRAM2DEV_1.B15 291.08,28.96 292.61,27.3 v306.07,27.3
  Bottom 0.152: v306.07,27.3 306.07,45.97 U2.1
ANA1_MINUS
  Bottom 0.152: U2.11 319.66,39.24 326.39,39.24 329.56,42.42 329.56,59.05 RS422.9
ANA1_PLUS
  Bottom 0.152: U2.10 320.17,37.34 328.29,37.34 332.74,41.78 332.74,59.69 RS422.10
CLK_1  (via drill 0.6)
  Top 0.152: R6.2 v108.2,92.96 v164.08,92.96
  Bottom 0.152: TRAM2DEV_3.B8 v164.08,92.96 | v108.2,92.96 TRAM2DEV_4.B8
CLK_2  (via drill 0.6)
  Top 0.152: R7.2 v232.54,90.55 v275.84,90.55
  Bottom 0.152: TRAM2DEV_2.B8 219.96,110.36 232.54,97.79 v232.54,90.55 | v275.84,90.55 TRAM2DEV_1.B8
CLK_3  (via drill 0.6)
  Top 0.152: v265.56,77.85 v209.8,77.85 208.79,77.85 R8.2
  Bottom 0.152: v265.56,77.85 265.43,29.34 TRAM2DEV_1.A8 | v209.8,77.85 TRAM2DEV_2.A8
CLK_4  (via drill 0.6)
  Top 0.152: v60.96,29.72 74.04,29.72 75.56,31.24 98.04,31.24 | 98.04,31.24 TRAM2DEV_4.A8 | 153.92,28.96 TRAM2DEV_3.A8 153.92,30.48 153.16,31.24 98.04,31.24
  Bottom 0.152: R9.2 58.42,48.77 IC1.43 59.69,36.7 60.96,35.43 v60.96,29.72
ERROR1_MINUS
  Top 0.152: R23.1 331.09,65.66 RS422.5 | U3.7 310.01,78.99 311.28,77.72 311.28,66.8 R20.1
  Bottom 0.152: R20.1 316.1,65.53 R23.1
ERROR1_PLUS
  Top 0.152: R20.2 314.45,72.52 319.4,72.52 324.74,67.18 332.87,67.18 RS422.6
  Bottom 0.152: U3.6 307.59,81.53 306.45,80.39 306.45,72.52 R27.2 R20.2
FAST_IN  (via drill 0.6)
  Top 0.152: v33.66,114.05 v8.13,114.05 | v44.45,28.07 v35.43,28.07
  Bottom 0.152: IC1.12 49.53,41.78 48.9,41.15 45.09,41.15 44.45,40.51 v44.45,28.07 44.45,19.18 45.09,18.54 65.53,18.54 68.58,15.49 ST1.D20 | v8.13,114.05 J9.3 | v35.43,28.07 33.66,29.84 v33.66,114.05
FAST_OUT  (via drill 0.6)
  Top 0.152: ST1.C20 v68.58,18.41 | v53.34,56.39 58.42,56.39 v270.64,56.52
  Bottom 0.152: v68.58,18.41 67.06,19.94 46.48,19.94 45.72,20.7 45.72,31.62 45.09,32.26 45.09,37.97 45.72,38.61 48.26,38.61 IC1.14 50.8,41.15 50.8,43.69 53.34,46.23 v53.34,56.39 | v270.64,56.52 270.76,114.81 273.69,117.73 292.48,117.73 J10.3
GLOBAL_RESET_IN  (via drill 0.6)
  Top 0.152: IC1.18 v38.1,32.26
  Bottom 0.152: ST1.D18 73.66,20.07 70.87,22.86 50.04,22.86 49.53,23.37 IC1.18 | v38.1,32.26 37.97,121.03 36.58,122.43 18.29,122.43 J9.6
GLOBAL_RESET_OUT  (via drill 0.6)
  Top 0.152: ST1.C18 73.66,23.11 72.64,24.13 v50.8,24.13 v26.92,24.13 | v26.92,56.9 32.51,56.9 34.93,54.48 v297.69,54.48
  Bottom 0.152: v50.8,24.13 50.8,33.53 IC1.19 | v297.69,54.48 297.69,114.94 J10.6 | v26.92,24.13 v26.92,56.9
GND  (via drill 0.6)
  Top 0.152: SJ1.1 315.72,58.42 311.91,54.61 C6.2
  Top 0.406: v172.72,16.51 ST1.A54
  Top 0.61: 289.56,16.51 ST1.A10 | v284.48,16.51 289.56,16.51 | v284.48,16.51 ST1.A10 | ST1.A10 294.64,16.51 289.56,16.51 | v271.78,16.51 ST1.A15 | v271.78,16.51 v284.48,16.51 | v259.08,16.51 v271.78,16.51 | v246.38,16.51 ST1.A25 | v246.38,16.51 v259.08,16.51 | 233.68,16.51 ST1.A30 | v246.38,16.51 233.68,16.51 | v259.08,16.51 ST1.A20 | ST1.A37 v215.9,16.51 218.44,16.51 | 233.68,16.51 218.44,16.51 | 218.44,16.51 ST1.A36
  Bottom 0.406: v82.55,16.51 81.28,16.51
  Bottom 0.61: v215.9,16.51 ST1.A37 | ST1.A25 v246.38,16.51 233.68,16.51 ST1.A30 | v259.08,16.51 ST1.A20 | v271.78,16.51 ST1.A15 | v284.48,16.51 ST1.A10 | ST1.B9 287.02,16.51 v284.48,16.51 | ST1.B7 292.1,16.51 v284.48,16.51 | 170.18,16.51 v165.1,16.51 ST1.B57 170.18,16.51 | ST1.D16 78.74,16.51 v82.55,16.51 83.82,16.51 | 83.82,16.51 86.36,16.51 | 86.36,16.51 88.9,16.51 | 88.9,16.51 91.44,16.51 | 93.98,16.51 v95.25,16.51 96.52,16.51 | 96.52,16.51 99.06,16.51 | 99.06,16.51 101.6,16.51 | 101.6,16.51 104.14,16.51 | 104.14,16.51 v105.41,16.51 106.68,16.51 | 106.68,16.51 109.22,16.51 | 109.22,16.51 111.76,16.51 | 111.76,16.51 v113.28,16.51 114.3,16.51 | 114.3,16.51 116.84,16.51 ST1.D01 | 81.28,16.51 ST1.D15 | 83.82,16.51 ST1.D14 | 86.36,16.51 ST1.D13 | 88.9,16.51 ST1.D12 | 93.98,16.51 ST1.D10 | 91.44,16.51 93.98,16.51 | 91.44,16.51 ST1.D11 | 96.52,16.51 ST1.D09 | 99.06,16.51 ST1.D08 | 101.6,16.51 ST1.D07 | 104.14,16.51 ST1.D06 | 106.68,16.51 ST1.D05 | 109.22,16.51 ST1.D04 | 111.76,16.51 ST1.D03 | 114.3,16.51 ST1.D02 | 170.18,16.51 v172.72,16.51 173.99,16.51 | 173.99,16.51 179.07,16.51 ST1.B53 173.99,16.51
L_IN  (via drill 0.6)
  Top 0.152: v35.56,116.33 v3.05,116.33
  Bottom 0.152: ST1.D21 66.04,15.24 65.53,15.75 42.8,15.75 41.91,16.64 41.91,44.32 42.55,44.96 IC1.9 | v3.05,116.33 J9.1 | v35.56,116.33 35.56,31.37 36.58,30.35 41.91,30.35
L_OUT  (via drill 0.6)
  Top 0.152: ST1.C21 66.04,15.75 v64.77,17.02 | v46.99,58.29 v268.73,58.29
  Bottom 0.152: v64.77,17.02 44.07,17.02 43.18,17.91 43.18,41.15 44.45,42.42 IC1.11 48.26,43.69 48.26,57.4 v46.99,58.29 | v268.73,58.29 268.73,115.44 273.18,119.89 J10.1
LINKIN1_MINUS
  Top 0.152: R17.2 328.29,77.98 328.29,71.75 RS422.3
  Bottom 0.152: U3.1 311.15,94.23 314.58,97.54 319.15,97.54 321.44,95.25 321.44,90.42 326.01,85.85 R24.1 R17.2
LINKIN1_PLUS  (via drill 0.6)
  Top 0.152: RS422.4 332.74,69.85 v332.74,74.42
  Bottom 0.152: U3.2 311.28,91.69 315.85,96.27 317.75,96.27 319.02,95 319.02,82.04 R17.1 320.93,77.81 R28.2 323.09,74.42 v332.74,74.42
LINKOUT1_MINUS
  Bottom 0.152: U2.13 323.72,41.4 325.37,43.05 325.37,69.85 326.64,71.12 RS422.1
LINKOUT1_PLUS  (via drill 0.6)
  Top 0.152: U2.14 v327.91,43.94
  Bottom 0.152: v327.91,43.94 327.91,68.58 329.18,69.85 332.74,69.85 RS422.2
N$1
  Top 0.152: QG1.8 PAD2.1
  Bottom 0.152: QG1.8 44.45,102.74 R1.2 R2.1 R3.1 R4.1 R5.1
N$2
  Top 0.152: R2.2 U1.1
N$3
  Top 0.152: R3.2 U1.3
N$4
  Top 0.152: R4.2 U1.5
N$5
  Top 0.152: R5.2 50.8,80.52 59.69,80.52 U1.9
N$6
  Bottom 0.152: U1.8 59.56,79.25 58.42,77.98 R9.1
N$7
  Top 0.152: U1.6 53.98,81.79 55.24,83.06 R8.1
N$8
  Top 0.152: U1.4 57.15,86.87 58.55,85.47 R7.1
N$9
  Top 0.152: U1.2 56.26,91.95 57.15,92.84 57.15,94.49 60.71,97.92 60.83,98.04 R6.1
N$10
  Bottom 0.152: R14.2 40.01,112.9 44.45,117.35 52.96,117.35 54.61,119 ERR.K
N$11  (via drill 0.6)
  Top 0.152: IC1.8 48.26,48.77 v40.01,48.77
  Bottom 0.152: v40.01,48.77 R14.1
N$12
  Top 0.406: ST1.A51 180.34,16.51 182.88,16.51 ST1.A50
N$13  (via drill 0.6)
  Top 0.152: v67.94,62.1 43.18,62.1 43.18,59.31 R15.1
  Bottom 0.152: IC1.24 57.15,30.35 59.69,27.81 61.6,27.81 67.94,34.16 v67.94,62.1
N$15
  Top 0.61: ST1.A44 198.12,16.51 200.66,16.51 ST1.A43
N$16
  Bottom 0.152: R15.2 42.8,66.29 42.16,66.93 42.16,111.25 46.99,116.08 58.42,116.08 60.83,118.49 OPT.K
N$18
  Top 0.152: RS422.12 RS422.11 SJ1.2
N$20
  Top 0.152: IC1.32 51.44,37.34 50.16,38.61 44.45,38.61 41.91,36.07 R10.2 16.64,39.24 JTAG.1
N$24
  Top 0.152: IC1.38 60.96,46.23 16,46.23 15.37,45.59 15.37,43.69 JTAG.2 12.19,40.51 R13.1
N$25
  Top 0.152: IC1.13 45.72,39.88 44.45,41.15 44.45,43.69 43.43,44.7 R12.1 16.89,44.7 JTAG.3
N$26
  Top 0.152: JTAG.5 R11.1 IC1.7
RESET1_MINUS  (via drill 0.6)
  Top 0.152: U2.3 316.36,51.18 v331.47,51.18
  Bottom 0.152: v331.47,51.18 RS422.13
RESET1_PLUS
  Top 0.152: U2.2 309.12,46.61 316.23,53.72 333.88,53.72 334.01,53.85 RS422.14
SLOW_IN  (via drill 0.6)
  Top 0.152: v31.24,111.89 v13.21,111.89 | v48.26,29.84 v31.24,29.84
  Bottom 0.152: ST1.D19 71.12,18.92 68.58,21.46 49.28,21.46 48.26,22.48 v48.26,29.84 48.26,36.07 IC1.16 | v13.21,111.89 J9.5 | v31.24,29.84 v31.24,111.89
SLOW_OUT  (via drill 0.6)
  Top 0.152: v47.37,21.34 70.23,21.34 71.12,20.45 ST1.C19 | J10.5 299.72,120.52 | v25.27,76.2 v295.91,76.2 | v25.27,34.8 IC1.17
  Bottom 0.152: IC1.17 46.99,21.84 v47.37,21.34 | v295.91,76.2 295.91,116.08 J10.5 | v25.27,34.8 v25.27,76.2
T_ERR_I  (via drill 0.6)
  Top 0.152: ST1.C17 76.2,22.99 74.17,25.02 52.96,25.02 v52.07,25.91 v28.96,25.91
  Bottom 0.152: v52.07,25.91 IC1.20 | J9.8 20.83,110.87 21.72,109.98 27.94,109.98 28.96,108.97 v28.96,25.91
T_ERR_O  (via drill 0.6)
  Top 0.152: v55.88,52.83 297.31,52.58 v299.59,52.58
  Bottom 0.152: ST1.D17 76.2,20.32 69.72,26.8 59.05,26.8 55.88,29.97 55.88,33.4 55.75,33.53 53.34,33.53 IC1.21 52.07,42.42 55.88,46.23 v55.88,52.83 | v299.59,52.58 299.59,114.17 302.13,117.47 306.7,117.47 307.34,117.98 J10.8
VCC  (via drill 0.6)
  Top 0.61: ST1.A4 v299.72,16.51 v302.26,16.51 ST1.A3 | 208.28,16.51 205.74,16.51 ST1.A41 v210.82,16.51 208.28,16.51 | 208.28,16.51 ST1.A40 | v154.94,16.51 v152.4,16.51 ST1.A62 157.48,16.51 | v154.94,16.51 157.48,16.51 | 157.48,16.51 160.02,16.51 ST1.A61 v154.94,16.51
  Bottom 0.406: ST1.A3 v302.26,16.51 v299.72,16.51 ST1.A4
  Bottom 0.61: v210.82,16.51 205.74,16.51 ST1.A41 v210.82,16.51 | ST1.A40 208.28,16.51 v210.82,16.51 | v152.4,16.51 ST1.A62 157.48,16.51 v154.94,16.51 | v154.94,16.51 ST1.A61 160.02,16.51 v154.94,16.51

## Text on the board
tPlace: ATW800 | TRAM Farmcard V1.0 | by Axel Muhr, GPL'ed | www.geekdot.com/atw800-farmcard
tNames: Optional TRAM-7/L3 | RS422 | TRAM 1 | TRAM 4 | TRAM 5 | TRAM 2 | TRAM 0 | TRAM 3 | TRAM 6 | TRAM 7